# EAGLE board SCART to DVI-A Compact (EAGLE 7.1.0)
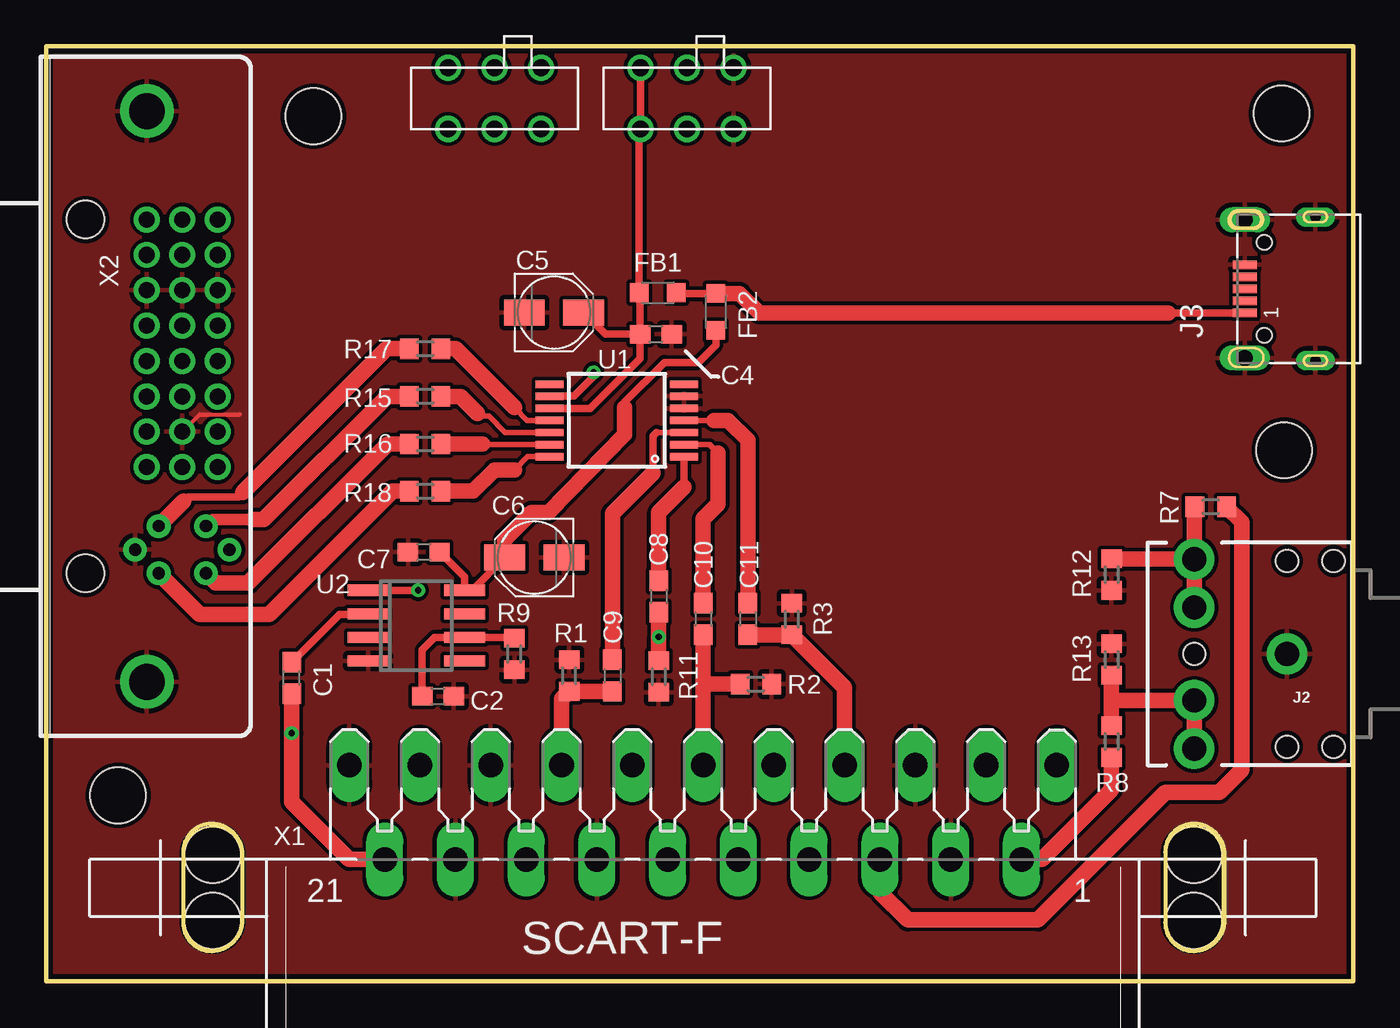
[diagram p0: board, top side]
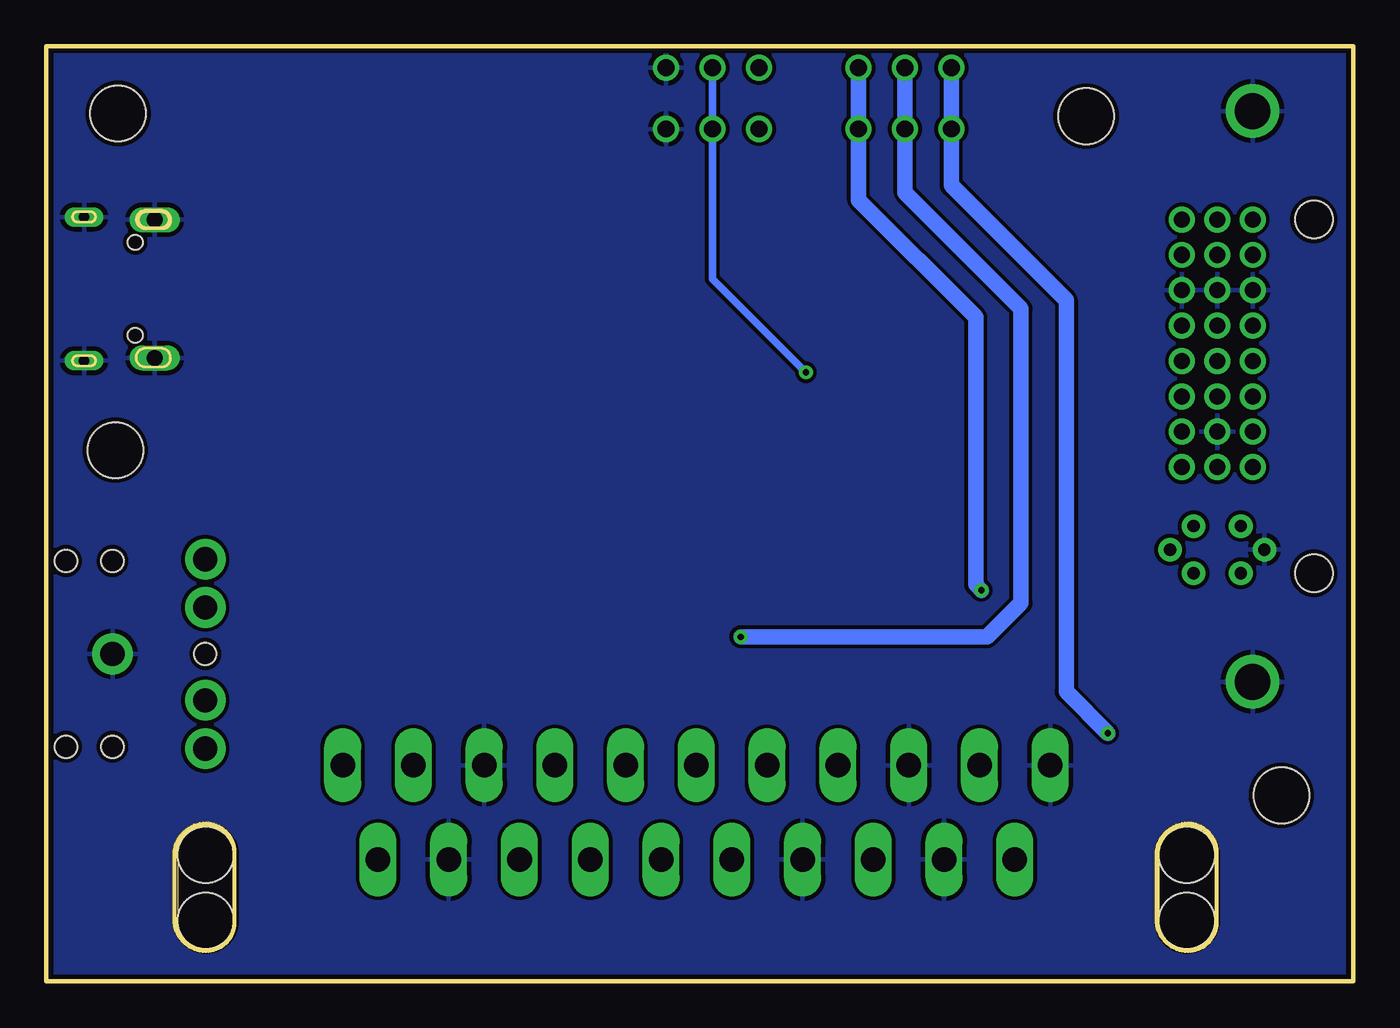
[diagram p1: board, bottom side, seen from below]

Size 70.36 x 50.34 mm. Coordinates in mm from the lower left corner, seen from the top.
Outline: 0,0 0,50.34 70.36,50.34 70.36,0 0,0
Copper layers (1*16): Top 0.035mm / dielectric 1.5mm / Bottom 0.035mm
Design rules "default *": minimum track width 10mil, minimum drill 24mil, track to track 8mil, track to pad 8mil, pad to pad 8mil, via to via 8mil, smd to smd 8mil, copper to edge 10mil, drill to drill 8mil, minimum pad ring 10mil, minimum via ring 8mil, stop-mask expansion 4mil, vias tented up to drill 0mil, thermal gap 10mil
Holes 3 mm at 3.86,10.01 66.65,28.6 66.5,46.74 14.38,46.58
Milling: area 7.4,1.6 to 10.6,8.5; area 60.2,1.6 to 63.4,8.5

## Footprints (pad centres in the part's own frame; a part is rotated, then mirrored left to right if it is on the bottom)
C0603 = smd 1.1 x 1: 1 -0.85,0; 2 0.85,0
PANASONIC_B = smd 2.2 x 1.4: + 1.6,0; - -1.6,0
L2012C = smd 1 x 1: 1 -1,0; 2 1,0
AUDIO-JACK-KIT = drill 1.3 pad 2.184: RING 5,5.1; RSH 5,2.5; SLEEVE 0,0; TIP 5,-5.1; TSH 5,-2.5 | hole 1.2: 0,5; -2.5,5; -2.5,-5; 0,-5; 5,0
629105150521 = smd 0.45 x 1.3: 1 -1.3,1.05; 2 -0.65,1.05; 3 0,1.05; 4 0.65,1.05; 5 1.3,1.05 | drill 0.85 pad 1.2 long: SHELL -3.725,1.05; SHELL1 3.725,1.05 | drill 0.55 pad 0.9 long: SHELL2 -3.875,-2.75; SHELL3 3.875,-2.75 | hole 0.8: -2.5,0; 2.5,0
R0603 = smd 1 x 1.1: 1 -0.85,0; 2 0.85,0
SO14W = smd 0.4 x 1.5: 1 -1.95,-3.625; 2 -1.3,-3.625; 3 -0.65,-3.625; 4 0,-3.625; 5 0.65,-3.625; 6 1.3,-3.625; 7 1.95,-3.625; 8 1.95,3.625; 9 1.3,3.625; 10 0.65,3.625; 11 0,3.625; 12 -0.65,3.625; 13 -1.3,3.625; 14 -1.95,3.625
SO08 = smd 0.6 x 2.2: 1 -1.905,-2.6; 2 -0.635,-2.6; 3 0.635,-2.6; 4 1.905,-2.6; 5 1.905,2.6; 6 0.635,2.6; 7 -0.635,2.6; 8 -1.905,2.6
JS202011 = drill 0.9: 1 -2.5,-1.7; 2 0,-1.7; 3 2.5,-1.7; 4 -2.5,1.6; 5 0,1.6; 6 2.5,1.6
SCART-F = drill 1.321 long: 1 19.05,5.08; 2 17.145,0; 3 15.24,5.08; 4 13.335,0; 5 11.43,5.08; 6 9.525,0; 7 7.62,5.08; 8 5.715,0; 9 3.81,5.08; 10 1.905,0; 11 0,5.08; 12 -1.905,0; 13 -3.81,5.08; 14 -5.715,0; 15 -7.62,5.08; 16 -9.525,0; 17 -11.43,5.08; 18 -13.335,0; 19 -15.24,5.08; 20 -17.145,0; 21 -19.05,5.08 | hole 3.023: 26.416,0.254; 26.416,-3.302; -26.416,0.254; -26.416,-3.302
DVI-I-R = drill 0.864 pad 1.397: 1 -9.525,6.985; 2 -7.62,6.985; 3 -5.715,6.985; 4 -3.81,6.985; 5 -1.905,6.985; 6 0,6.985; 7 1.905,6.985; 8 3.81,6.985; 9 -9.525,5.08; 10 -7.62,5.08; 11 -5.715,5.08; 12 -3.81,5.08; 13 -1.905,5.08; 14 0,5.08; 15 1.905,5.08; 16 3.81,5.08; 17 -9.525,3.175; 18 -7.62,3.175; 19 -5.715,3.175; 20 -3.81,3.175; 21 -1.905,3.175; 22 0,3.175; 23 1.905,3.175; 24 3.81,3.175 | drill 0.66 pad 1.27: C1 6.985,6.35; C2 9.525,6.35; C3 6.985,3.81; C4 9.525,3.81; C5 8.255,2.54; C6 8.255,7.62 | drill 1.93: GND@1 -15.367,3.175; GND@2 15.367,3.175 | hole 2.032: -9.525,-0.127; 9.525,-0.127

## Placement (x,y rotation side)
C1  100nF  [C0603]  13.21,16.33 90 top
C2  100nF  [C0603]  21.08,15.34 0 top
C4  100nF  [C0603]  32.82,34.85 0 top
C5  100uF 6.3V  [PANASONIC_B]  27.33,36.02 0 top
C6  100uF 6.3V  [PANASONIC_B]  26.26,22.81 180 top
C7  100nF  [C0603]  20.32,23.11 180 top
C8  100nF  [C0603]  32.97,20.73 270 top
C9  100nF  [C0603]  30.48,16.46 270 top
C10  100nF  [C0603]  35.36,19.51 270 top
C11  100nF  [C0603]  37.77,19.51 270 top
FB1  FB_330R  [L2012C]  32.92,37.08 0 top
FB2  FB_330R  [L2012C]  36.04,36.04 90 top
J2  AUDIO_JACK_3.5MM_KIT  [AUDIO-JACK-KIT]  66.8,17.63 180 top
J3  [629105150521]  65.58,37.29 90 top
R1  75R  [R0603]  28.14,16.46 270 top
R2  75R  [R0603]  38.2,16 180 top
R3  75R  [R0603]  40.13,19.51 270 top
R7  100R  [R0603]  62.69,25.55 0 top
R8  100R  [R0603]  57.35,12.9 270 top
R9  680K  [R0603]  25.2,17.63 270 top
R11  75R  [R0603]  32.97,16.41 90 top
R12  100R  [R0603]  57.35,21.89 270 top
R13  100R  [R0603]  57.35,17.32 90 top
R15  75R  [R0603]  20.4,31.5 0 top
R16  75R  [R0603]  20.4,28.93 0 top
R17  75R  [R0603]  20.4,34.06 0 top
R18  75R  [R0603]  20.4,26.39 0 top
U1  THS7374  [SO14W]  30.71,30.2 90 top
U2  LM1881  [SO08]  19.91,19.15 270 top
U$2  JS202011  [JS202011]  24.13,47.5 180 top
U$3  JS202011  [JS202011]  34.49,47.5 180 top
X1  SCART-F  [SCART-F]  35.36,6.55 0 top
X2  DVI-I-R  [DVI-I-R]  2.24,31.5 270 top

## Library data of the parts
C1 C2 C4-C11 FB1 FB2 R1-R3 R7-R9 R11-R13 R15-R18 = rcl
J2 = SparkFun-Connectors; PROD_ID: CONN-08774; SF_ID: PRT-08032
J3 = con-wurth
U1 = texas
U2 = national-semiconductor
U$2 U$3 = switch
X1 = con-hirschmann; OC_FARNELL: unknown; OC_NEWARK: unknown
X2 = con-molex; OC_FARNELL: unknown; OC_NEWARK: unknown

## Nets
+5V: FB1.2 FB2.2 J3.1
AGND: X2.C6
CH1_OUT: R15.2 U1.12
CH2_OUT: R16.2 U1.13
CH3_OUT: R17.2 U1.11
CH4_OUT: R18.2 U1.14
CSYNC_IN: C8.2 R11.2 U$2.2 U$2.5
DVI_5V: X2.14
DVI_OUT_B: R17.1 X2.C3
DVI_OUT_G: R16.1 X2.C2
DVI_OUT_HSYNC: R18.1 X2.C4
DVI_OUT_R: R15.1 X2.C1
GND: C2.2 C4.2 C5.- C6.- C7.2 J2.SLEEVE J3.5 J3.SHELL J3.SHELL1 J3.SHELL2 J3.SHELL3 R1.1 R2.1 R3.1 R9.2 R11.1 R12.2 R13.2 U1.5 U1.6 U2.4 U$3.1 U$3.4 X1.4 X1.5 X1.14 X1.17 X1.18 X1.21 X2.3 X2.11 X2.15 X2.19 X2.C5 X2.GND@1 X2.GND@2
LM_OUT_CSYNC: U2.1 U$2.1 U$2.4
N$1: C1.2 U2.2
N$2: C6.+ C7.1 FB2.1 U2.8
N$5: C2.1 R9.1 U2.6
OUT_AUD_L: J2.TIP J2.TSH R7.1 R12.1
OUT_AUD_R: J2.RING J2.RSH R8.1 R13.1
SCART_IN_AUD_L: R7.2 X1.6
SCART_IN_AUD_R: R8.2 X1.2
SCART_IN_B: C11.2 R3.2 X1.7
SCART_IN_CVID: C1.1 U$2.3 U$2.6 X1.20
SCART_IN_G: C10.2 R2.2 X1.11
SCART_IN_R: C9.2 R1.2 X1.15
THS_5V: C4.1 C5.+ FB1.1 U1.10 U$3.3 U$3.6
THS_FILTER: U1.9 U$3.2 U$3.5
THS_IN_B: C11.1 U1.4
THS_IN_CSYNC: C8.1 U1.1
THS_IN_G: C10.1 U1.2
THS_IN_R: C9.1 U1.3

## Tracks (layer width: path | path; a pad name or v marks a point on that pad's centre or on a via)
+5V
  Top 0.406: FB1.2 33.96,37.04 FB2.2 | J3.1 60.4,35.99
  Top 0.838: FB2.2 37.33,37.04 38.38,35.99 60.4,35.99
CH1_OUT
  Top 0.305: U1.12 24.7,29.55 23.83,30.43 23.37,30.43 23.22,30.58
  Top 0.838: R15.2 22.3,31.5 23.22,30.58
CH2_OUT
  Top 0.305: U1.13 23.52,28.9 23.49,28.93
  Top 0.406: R16.2 21.27,28.9
  Top 0.838: 23.49,28.93 R16.2
CH3_OUT
  Top 0.305: U1.11 25.88,30.2 25.2,30.89
  Top 0.838: R17.2 22.02,34.06 25.2,30.89
CH4_OUT
  Top 0.305: 25.2,27.53 25.91,28.25 U1.14
  Top 0.838: 25.2,27.53 24.13,27.53 22.99,26.39 R18.2
CSYNC_IN  (via drill 0.33)
  Top 0.838: C8.2 v32.97,18.54 R11.2
  Bottom 0.838: v32.97,18.54 19.71,18.54 17.88,20.37 17.88,36.22 24.13,42.47 U$2.5 U$2.2
DVI_OUT_B
  Top 0.406: 10.57,26.31 10.34,26.09 7.62,26.09 7.39,25.86
  Top 0.838: 7.39,25.86 X2.C3 | 10.57,26.31 18.31,34.06 R17.1
DVI_OUT_G
  Top 0.838: X2.C2 9.12,21.44 10.87,21.44 18.36,28.93 R16.1
DVI_OUT_HSYNC
  Top 0.838: X2.C4 8.25,19.76 12,19.76 18.63,26.39 R18.1
DVI_OUT_R
  Top 0.61: 11.1,24.87 8.94,24.87 X2.C1
  Top 0.838: 11.1,24.87 11.71,24.87 18.34,31.5 R15.1
GND
  Top 0.203: 10.41,30.53 8.25,30.53 X2.15
  pour Top: 0,0 0,50.34 70.36,50.34 70.36,0
  pour Bottom: 0,0 0,50.34 70.36,50.34 70.36,0
LM_OUT_CSYNC  (via drill 0.33)
  Top 0.406: U2.1 v20.02,21.06
  Bottom 0.838: v20.02,21.06 20.32,21.36 20.32,35.76 26.63,42.07 U$2.4 U$2.1
N$1
  Top 0.406: U2.2 17.29,19.76 15.79,19.76 C1.2
N$2
  Top 0.254: 22.41,21.16 U2.8
  Top 0.406: FB2.1 36.04,34.26 35.1,33.32 33.27,33.32 31.14,31.19 31.14,30.89 | C7.1 22.51,21.77 U2.8 22.91,21.06 C6.+ 24.89,23.04
  Top 0.838: 31.14,30.89 31.14,29.44 27.03,25.25 26.11,25.25 24.66,23.8 C6.+
N$5
  Top 0.406: R9.1 25.16,18.52 U2.6 20.9,18.52 20.23,17.84 C2.1
OUT_AUD_L
  Top 0.838: J2.TSH J2.TIP | J2.TIP 61.8,25.52 R7.1 | R12.1 61.8,22.74 J2.TIP
OUT_AUD_R
  Top 0.838: J2.RING J2.RSH 57.35,15.13 | 57.35,15.13 R8.1 | R13.1 57.35,15.13
SCART_IN_AUD_L
  Top 0.838: R7.2 64.36,24.73 64.36,11.38 63.14,10.16 60.25,10.16 53.39,3.3 46.38,3.3 44.88,4.8 X1.6
SCART_IN_AUD_R
  Top 0.838: X1.2 53.59,6.55 57.35,10.31 R8.2
SCART_IN_B
  Top 0.838: X1.7 42.98,15.81 R3.2 C11.2
SCART_IN_CVID  (via drill 0.33)
  Top 0.838: X1.20 16.31,6.55 13.21,9.65 v13.21,13.36 C1.1
  Bottom 0.61: 18.21,6.32 X1.20
  Bottom 0.838: v13.21,13.36 15.44,15.6 15.44,36.68 21.63,42.86 U$2.6 U$2.3
SCART_IN_G
  Top 0.838: C10.2 35.36,15.95 | 35.36,15.95 X1.11 | R2.2 35.41,16 35.36,15.95
SCART_IN_R
  Top 0.838: C9.2 R1.2 27.74,15.2 X1.15
THS_5V
  Top 0.406: U1.10 29.28,30.85 31.97,33.54 C4.1 | U$3.3 U$3.6 31.92,45.82 FB1.1 31.97,36.83 C4.1 | C5.+ 30.1,34.85 C4.1
THS_FILTER  (via drill 0.33)
  Top 0.406: U1.9 28.4,31.5 29.46,32.56 v29.46,32.79
  Bottom 0.406: U$3.2 U$3.5 34.49,37.82 v29.46,32.79
THS_IN_B
  Top 0.305: 35.94,30.2 U1.4
  Top 0.838: 35.94,30.2 36.7,30.2 37.77,29.13 C11.1
THS_IN_CSYNC
  Top 0.406: 34.34,26.62 U1.1
  Top 0.838: C8.1 32.97,25.25 34.34,26.62
THS_IN_G
  Top 0.254: U1.2
  Top 0.305: U1.2 35.72,28.9 36.17,28.45
  Top 0.838: 36.17,28.45 36.17,25.7 35.36,24.89 C10.1
THS_IN_R
  Top 0.305: U1.3 32.85,29.55
  Top 0.406: 32.66,27.38 32.66,29.36 32.85,29.55
  Top 0.838: C9.1 30.48,25.2 32.66,27.38